# EAGLE board SOIC14_SO14L-DIP (EAGLE 8.4.3)
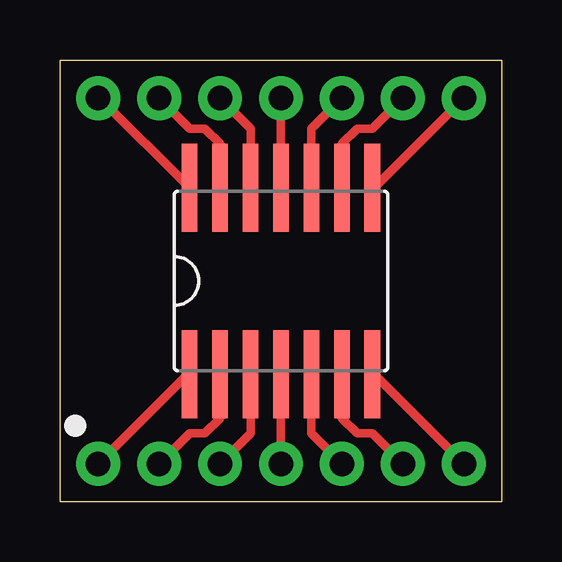
[diagram p0: board, top side]
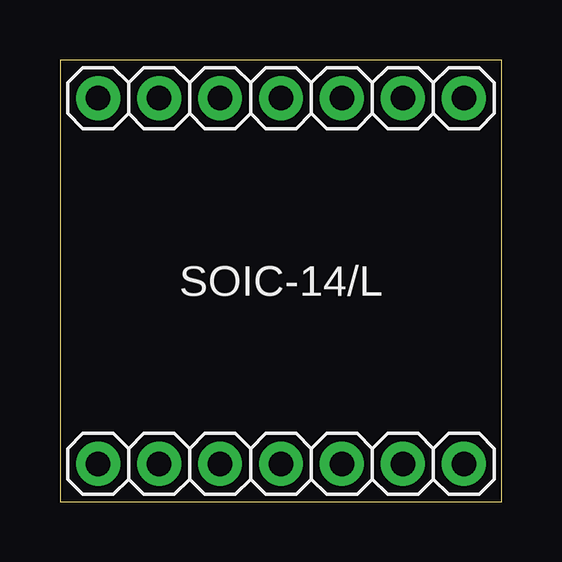
[diagram p1: board, bottom side, seen from below]

Size 18.41 x 18.41 mm. Coordinates in mm from the lower left corner, seen from the top.
Outline: 0,0 0,18.41 18.41,18.41 18.41,0 0,0
Copper layers (1*16): Top 0.035mm / dielectric 1.6mm / Bottom 0.035mm
Design rules "Elecrow_2-layer_PCB_eagle_rule *": minimum track width 6mil, minimum drill 12mil, track to track 6mil, track to pad 6mil, pad to pad 6mil, via to via 8mil, smd to smd 0mil, copper to edge 20mil, drill to drill 10mil, minimum pad ring 16mil, minimum via ring 6mil, stop-mask expansion 0mil, vias tented up to drill 100mil, thermal gap 10mil

## Footprints (pad centres in the part's own frame; a part is rotated, then mirrored left to right if it is on the bottom)
ADAPTER-14L = drill 1.016: 1 1.587,1.587; 2 4.128,1.587; 3 6.668,1.587; 4 9.207,1.587; 5 11.748,1.587; 6 14.287,1.587; 7 16.828,1.587; 8 16.828,16.828; 9 14.287,16.828; 10 11.748,16.828; 11 9.207,16.828; 12 6.668,16.828; 13 4.128,16.828; 14 1.587,16.828
SO14/L = smd 0.66 x 3.658: 1 -3.81,-3.886; 2 -2.54,-3.886; 3 -1.27,-3.886; 4 0,-3.886; 5 1.27,-3.886; 6 2.54,-3.886; 7 3.81,-3.886; 8 3.81,3.886; 9 2.54,3.886; 10 1.27,3.886; 11 0,3.886; 12 -1.27,3.886; 13 -2.54,3.886; 14 -3.81,3.886

## Placement (x,y rotation side)
SOIC-14/L  ADAPTER-14L  [ADAPTER-14L]  0,0 0 top
U$1  DUMMY14  [SO14/L]  9.21,9.21 0 top

## Library data of the parts
SOIC-14/L = my-pinhead
U$1 = my-ic

## Nets
1: SOIC-14/L.1 U$1.1
2: SOIC-14/L.2 U$1.2
3: SOIC-14/L.3 U$1.3
4: SOIC-14/L.4 U$1.4
5: SOIC-14/L.5 U$1.5
6: SOIC-14/L.6 U$1.6
7: SOIC-14/L.7 U$1.7
N$8: SOIC-14/L.8 U$1.8
N$9: SOIC-14/L.13 U$1.13
N$10: SOIC-14/L.12 U$1.12
N$11: SOIC-14/L.11 U$1.11
N$12: SOIC-14/L.10 U$1.10
N$13: SOIC-14/L.9 U$1.9
N$15: SOIC-14/L.14 U$1.14

## Tracks (layer width: path | path; a pad name or v marks a point on that pad's centre or on a via)
1
  Top 0.356: SOIC-14/L.1 5.32,5.32 U$1.1
2
  Top 0.356: U$1.2 6.67,3.49 6.03,2.86 5.4,2.86 SOIC-14/L.2
3
  Top 0.356: U$1.3 7.94,2.86 SOIC-14/L.3
4
  Top 0.356: SOIC-14/L.4 U$1.4
5
  Top 0.356: U$1.5 10.48,2.86 SOIC-14/L.5
6
  Top 0.356: U$1.6 11.75,3.49 12.38,2.86 13.02,2.86 SOIC-14/L.6
7
  Top 0.356: SOIC-14/L.7 13.09,5.32 U$1.7
N$8
  Top 0.356: SOIC-14/L.8 13.09,13.09 U$1.8
N$9
  Top 0.356: U$1.13 6.67,14.92 6.03,15.56 5.4,15.56 SOIC-14/L.13
N$10
  Top 0.356: U$1.12 7.94,15.56 SOIC-14/L.12
N$11
  Top 0.356: U$1.11 SOIC-14/L.11
N$12
  Top 0.356: U$1.10 10.48,15.56 SOIC-14/L.10
N$13
  Top 0.356: U$1.9 11.75,14.92 12.38,15.56 13.02,15.56 SOIC-14/L.9
N$15
  Top 0.356: SOIC-14/L.14 1.66,16.83 U$1.14